# Altium PCB 功耗测试工装.PcbDoc (part 1 of 2)
Units mm, origin at the board's own origin, x right, y up, seen from the top; angles counter-clockwise.
Board outline 154.34 x 149.4 mm, 2 copper layers (Component Side, Bottom Layer), stack 0.325 mm thick; 158 components, 88 nets, 495 pads, 374 vias.
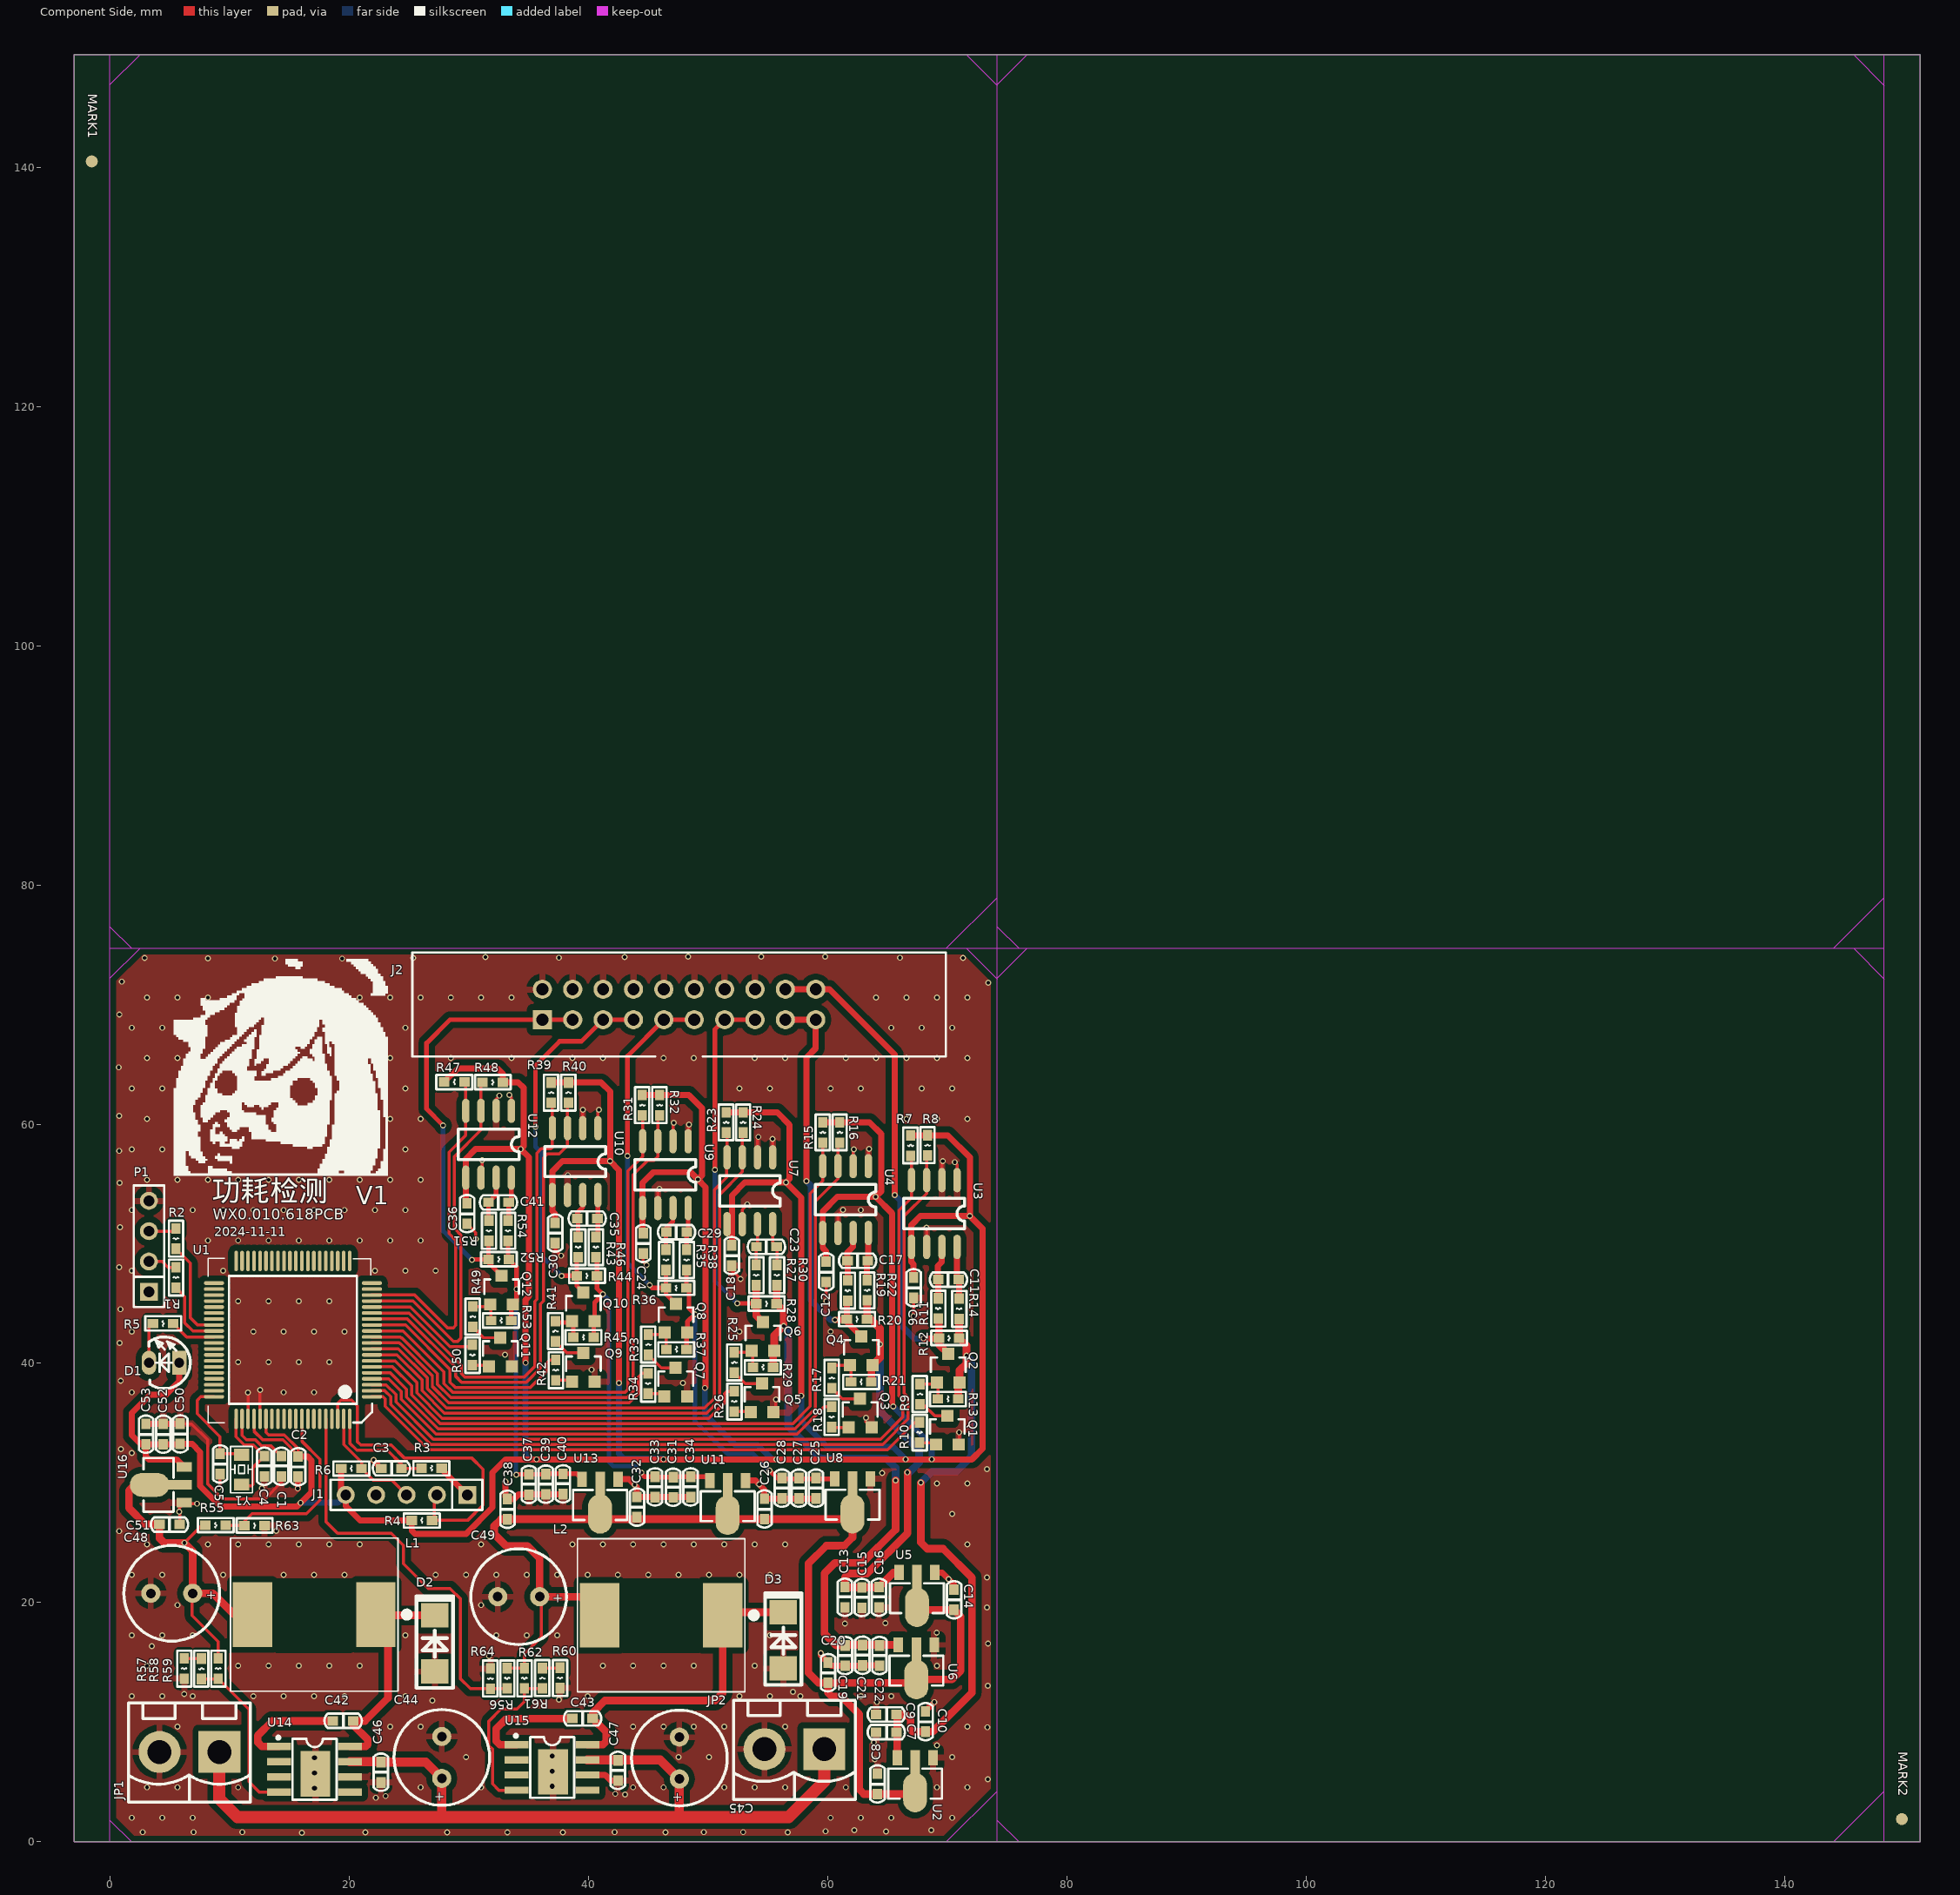
[diagram p0: Component Side view]
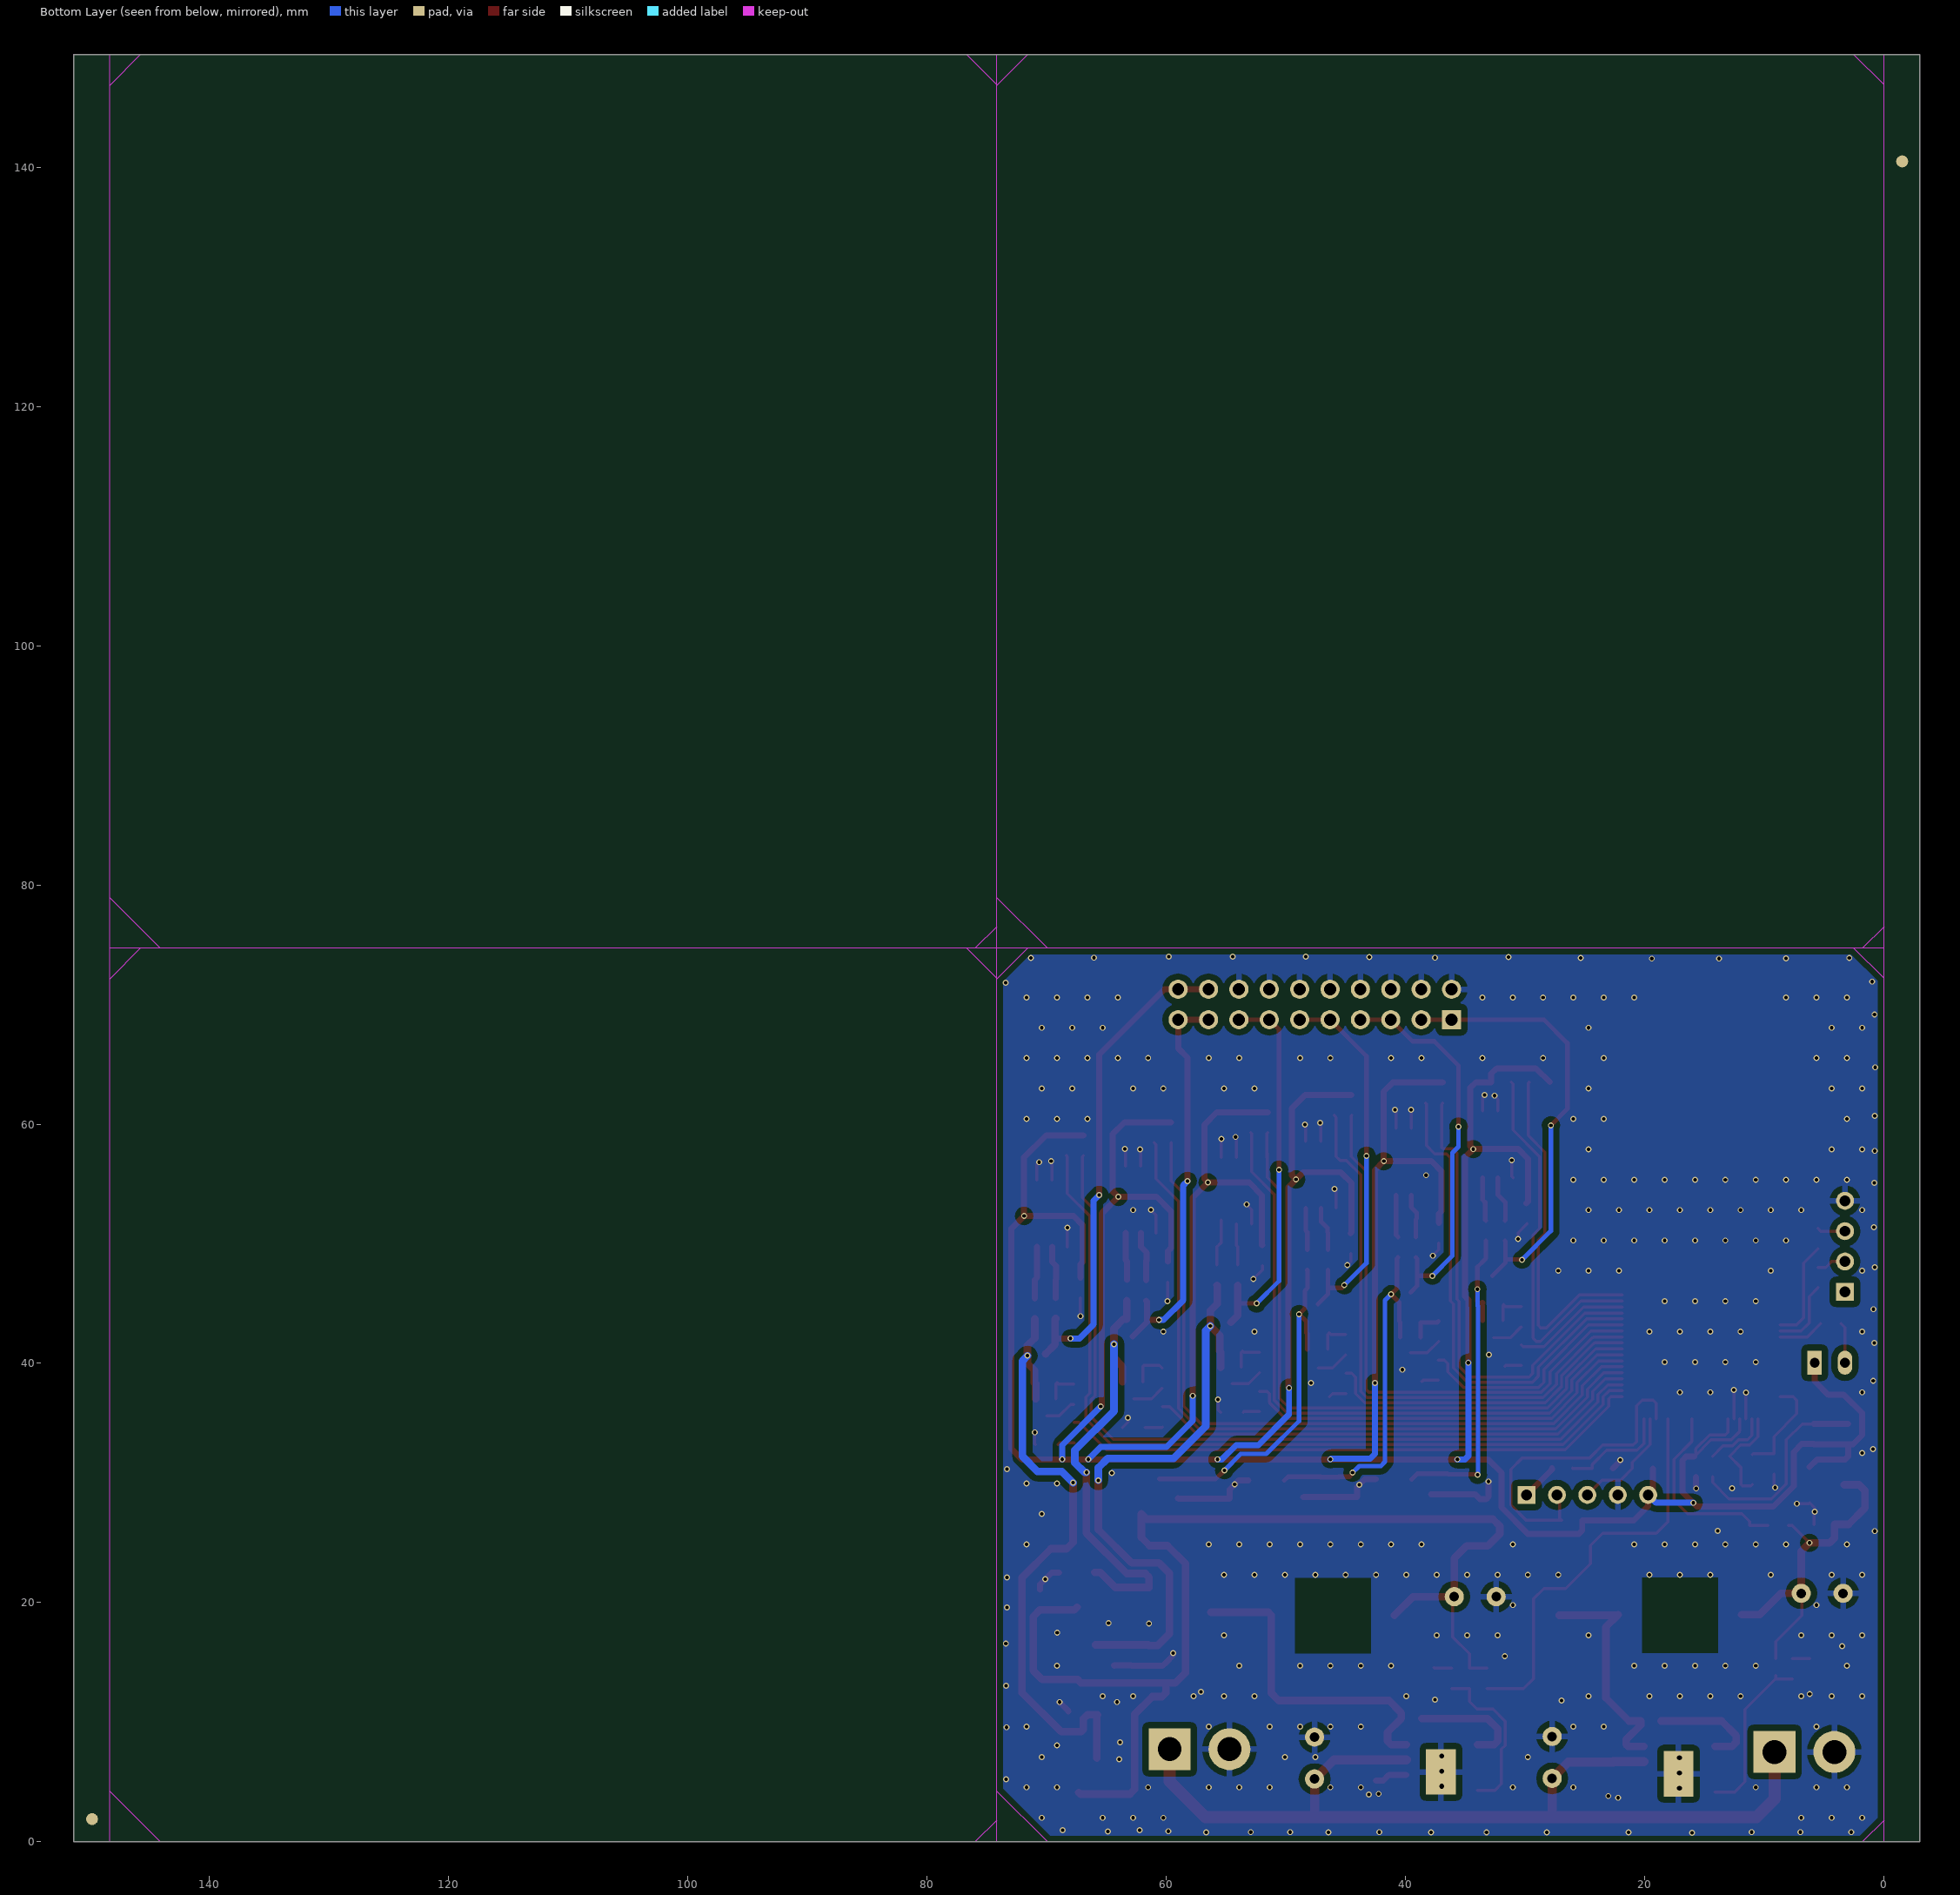
[diagram p1: Bottom Layer view, seen from below]

## Layer stack, top to bottom
Top Solder: solder mask 0.0102, Solder Resist, Dk 3.5
Component Side: signal copper 0.0356
Dielectric 1: core 0.254, FR-4, Dk 4.2
Bottom Layer: signal copper 0.0356
Solder Side: solder mask 0.0102, Solder Resist, Dk 3.5

## Board outline
-3,0 151.336,0 151.336,149.403 -3,149.403

## Design rules (kind name [scope] priority, off if disabled: settings)
Clearance VIA-VIA [ISVIA vs ISVIA] p1: gap=0.508 ignorepadtopadclearanceinfootprint=FALSE except(0: Arc-Hole Track-Hole SMDPad-Hole THPad-Hole Via-Hole Fill-Hole Poly-Hole Region-Hole Text-Hole)
Clearance VIA-PAD [ISVIA vs ISPAD] p2: gap=0.381 ignorepadtopadclearanceinfootprint=FALSE except(0: Arc-Hole Track-Hole SMDPad-Hole THPad-Hole Via-Hole Fill-Hole Poly-Hole Region-Hole Text-Hole)
Clearance VIA-TRACK [ISVIA vs ISTRACK] p3: gap=0.381 ignorepadtopadclearanceinfootprint=FALSE except(0: Arc-Hole Track-Hole SMDPad-Hole THPad-Hole Via-Hole Fill-Hole Poly-Hole Region-Hole Text-Hole)
Clearance Polygon [InPolygon] p4: gap=0.508 ignorepadtopadclearanceinfootprint=FALSE except(0: Arc-Hole Track-Hole SMDPad-Hole THPad-Hole Via-Hole Fill-Hole Poly-Hole Region-Hole Text-Hole; 1.016: Poly-Poly)
Clearance [All] p5: gap=0.178 ignorepadtopadclearanceinfootprint=FALSE except(0: Arc-Hole Track-Hole SMDPad-Hole THPad-Hole Via-Hole Fill-Hole Poly-Hole Region-Hole Text-Hole)
ComponentClearance [All] p1 off: gap=0.254 collisioncheckmode=3 verticalgap=0.254 showdistances=FALSE
FabricationTestPointUsage TestPointUsage [All] p1: valid=0 allowmultiple=FALSE
FabricationTestpoint Testpoint [(IsPad And (OnTopLayer Or OnBottomLayer))] p1: side=3 testpointundercomponent=TRUE minsize=1.016 maxsize=2.54 preferedsize=1.524 minholesize=0 maxholesize=1.016 preferedholesize=0.813 testpointgrid=0.025 allowsidetop=TRUE allowsidebottom=TRUE usegrid=TRUE gridtolerance=0
HoleSize [All] p1 off: absolutevalues=TRUE maxlimit=7.62 minlimit=0 maxpercent=80.000 minpercent=20.000
HoleToHoleClearance [All] p1 off: gap=0.254 allowstackedmicrovias=TRUE
LayerPairs [All] p1 off: enforce=TRUE
MinimumSolderMaskSliver [All] p1 off: minsoldermaskwidth=0.254
NetAntennae [All] p1 off: netantennaetolerance=0
PlaneConnect [All] p1: planeconnectstyle=Relief reliefexpansion=0.508 reliefentries=4 reliefconductorwidth=0.508 reliefairgap=0.254
PolygonConnect [isvia] p1: connectstyle=Direct reliefconductorwidth=0.381 reliefentries=4 polygonreliefangle="90 Angle" airgapwidth=0.254
PolygonConnect PolygonConnect_1 [All] p2: connectstyle=Relief reliefconductorwidth=0.508 reliefentries=4 polygonreliefangle="90 Angle" airgapwidth=0.508
RoutingVias [All] p1: holewidth=0.254 width=0.508 viastyle="Through Hole" minholewidth=0.127 minwidth=0.127 maxholewidth=1.27 maxwidth=2.54
SilkToBoardRegionClearance [All] p1 off:
SilkToSilkClearance [All] p1 off: silktosilkclearance=0.254
SilkToSolderMaskClearance [IsPad] p1 off: minsilkscreentomaskgap=0.254 clearancetoexposedcopper=TRUE
SolderMaskExpansion [All] p1: expansion=0.102
Width [All] p1: maxlimit=7.62 minlimit=0.203 preferedwidth=0.203
18 further rules are at their usual default settings.

## Classes and differential pairs
component class 功耗测试工装2: C1 C2 C3 C4 C5 D1 J1 P1 R1 R2 R3 R4 R5 R6 U1 Y1
component class 功耗测试工装: C6 C7 C8 C9 C10 C11 C12 C13 C14 C15 C16 C17 C18 C19 C20 C21 C22 C23 C24 C25 C26 C27 C28 C29 C30 C31 C32 C33 C34 C35 C36 C37 C38 C39 C40 C41 C42 C43 C44 C45 C46 C47 C48 C49 C50 C51 C52 C53 D2 D3 J2 JP1 JP2 L1 L2 Q1 Q2 Q3 Q4 Q5 Q6 Q7 Q8 Q9 Q10 Q11 Q12 R7 R8 R9 R10 R11 R12 R13 R14 R15 R16 R17 R18 R19 R20 R21 R22 R23 R24 R25 R26 R27 R28 R29 R30 R31 R32 R33 R34 R35 R36 R37 R38 R39 R40 R41 R42 R43 R44 R45 R46 R47 R48 R49 R50 R51 R52 R53 R54 R55 R56 R57 R58 R59 R60 R61 R62 R63 R64 U2 U3 U4 U5 U6 U7 U8 U9 U10 U11 U12 U13 U14 U15 U16

## Components (designator, comment, footprint, x,y, rotation, side; value= is the part's Value field where it differs from the comment)
C1 "100nF/50V" CAP0603 14.326,32.233 r270 top
C2 "100nF/50V" CAP0603 15.723,30.531 r90 top
C3 "33pF/50V" CAP0603 24.359,31.217 r180 top
C4 "12pF/50V" CAP0603 12.903,32.233 r270 top
C5 "12pF/50V" CAP0603 9.195,30.759 r90 top
C6 "100nF/50V" CAP0603 67.183,45.491 r90 top
C7 "10uF/10V" CAP0603 65.735,9.169 r180 top
C8 "100nF/50V" CAP0603 64.16,4.013 r90 top
C9 "100N/50V" CAP0603 65.735,10.643 r180 top
C10 "22pF/50V" CAP0603 68.174,9.22 r90 top
C11 "100nF/50V" CAP0603 69.266,47.015 r0 top
C12 "100nF/50V" CAP0603 59.868,46.812 r90 top
C13 "10uF/10V" CAP0603 61.443,21.285 r270 top
C14 "100nF/50V" CAP0603 70.561,19.406 r90 top
C15 "100N/50V" CAP0603 62.865,21.26 r270 top
C16 "22pF/50V" CAP0603 64.287,21.285 r270 top
C17 "100nF/50V" CAP0603 61.671,48.59 r0 top
C18 "100nF/50V" CAP0603 51.968,48.184 r90 top
C19 "10uF/10V" CAP0603 61.468,16.408 r270 top
C20 "100nF/50V" CAP0603 60.02,13.31 r90 top
C21 "100N/50V" CAP0603 62.916,16.434 r270 top
C22 "22pF/50V" CAP0603 64.338,16.408 r270 top
C23 "100nF/50V" CAP0603 54.051,49.759 r0 top
C24 "100nF/50V" CAP0603 44.577,49.2 r90 top
C25 "10uF/10V" CAP0603 59.03,30.404 r270 top
C26 "100nF/50V" CAP0603 54.712,27 r90 top
C27 "100N/50V" CAP0603 57.607,30.404 r270 top
C28 "22pF/50V" CAP0603 56.185,30.404 r270 top
C29 "100nF/50V" CAP0603 46.533,50.978 r0 top
C30 "100nF/50V" CAP0603 37.211,50.063 r90 top
C31 "10uF/10V" CAP0603 47.092,30.48 r270 top
C32 "100nF/50V" CAP0603 44.044,27.153 r90 top
C33 "100N/50V" CAP0603 45.568,30.505 r270 top
C34 "22pF/50V" CAP0603 48.539,30.505 r270 top
C35 "100nF/50V" CAP0603 39.065,52.121 r0 top
C36 "100nF/50V" CAP0603 29.845,51.689 r90 top
C37 "10uF/10V" CAP0603 35.027,30.709 r270 top
C38 "100nF/50V" CAP0603 33.223,26.975 r90 top
C39 "100N/50V" CAP0603 36.449,30.734 r270 top
C40 "22pF/50V" CAP0603 37.871,30.759 r270 top
C41 "100nF/50V" CAP0603 31.648,53.467 r0 top
C42 "10N/50V" CAP0603 20.32,10.109 r180 top
C43 "10N/50V" CAP0603 40.335,10.312 r180 top
C44 "1000uF/16V" CAPPC_350_800_1600 27.737,5.309 r90 top
C45 "1000uF/16V" CAPPC_350_800_1600 47.6,5.258 r90 top
C46 "100N/50V" CAP0603 22.657,6.655 r270 top
C47 "100N/50V" CAP0603 42.469,6.807 r270 top
C48 "1000uF/16V" CAPPC_350_800_1600 6.909,20.777 r180 top
C49 "1000uF/16V" CAPPC_350_800_1600 35.916,20.498 r180 top
C50 "10uF/10V" CAP0603 5.867,33.274 r90 top
C51 "100nF/50V" CAP0603 4.14,26.543 r0 top
C52 "100N/50V" CAP0603 4.445,33.249 r90 top
C53 "22pF/50V" CAP0603 2.997,33.249 r90 top
D1 "LED_T3R" LED2_300 5.791,40.056 r270 top
D2 "B340A-SMA" DO-214AC 27.153,16.586 r90 top
D3 "B340A-SMA" DO-214AC 56.286,16.84 r90 top
J1 "PIN254_1*5*WXHJ" PIN254_1*5*1100S 29.87,29.007 r180 top
J2 "DC254_2*10" DC254_2*10 47.574,70.002 r90 top
JP1 "KF129_508_2" KF129_508_2 9.144,7.518 r180 top
JP2 "KF129_508_2" KF129_508_2 59.715,7.747 r180 top
L1 "LQS1260M2200_47uH" LQS1212 17.069,18.999 r180 top
L2 "LQS1260M2200_47uH" LQS1212 46.076,18.948 r180 top
MARK1 "MARK" MARK -1.53,140.481 r0 top (schematic designator MARK3)
MARK2 "MARK" MARK 149.809,1.905 r0 top (schematic designator MARK3)
P1 "PIN254_1*4*WXHJ" PIN254_1*4*1100S 3.251,45.974 r90 top
Q1 "NPNS-9013" SOT-23 70.002,34.417 r0 top
Q2 "RZR040P01TL" SOT-23 70.079,39.599 r0 top
Q3 "NPNS-9013" SOT-23 62.713,35.839 r0 top
Q4 "RZR040P01TL" SOT-23 62.814,41.046 r0 top
Q5 "NPNS-9013" SOT-23 54.508,37.109 r0 top
Q6 "RZR040P01TL" SOT-23 54.585,42.24 r0 top
Q7 "NPNS-9013" SOT-23 47.295,38.43 r0 top
Q8 "RZR040P01TL" SOT-23 47.32,43.764 r0 top
Q9 "NPNS-9013" SOT-23 39.573,39.675 r0 top
Q10 "RZR040P01TL" SOT-23 39.573,44.729 r0 top
Q11 "NPNS-9013" SOT-23 32.639,40.945 r0 top
Q12 "RZR040P01TL" SOT-23 32.741,46.126 r0 top
R1 "22R 5%" RES0603 5.512,46.33 r90 top
R2 "22R 5%" RES0603 5.512,49.581 r90 top
R3 "100R 5%" RES0603 26.035,31.242 r0 top
R4 "10K 5%" RES0603 25.222,26.873 r0 top
R5 "1K 5%" RES0603 5.283,43.332 r180 top
R6 "10K 5%" RES0603 19.329,31.217 r0 top
R7 "10K 5%" RES0603 66.929,59.055 r270 top
R8 "10K 5%" RES0603 68.351,59.08 r270 top
R9 "200K 5%" RES0603 67.716,38.278 r270 top
R10 "1K 5%" RES0603 67.691,33.376 r90 top
R11 "10R 5%" RES0603 69.24,43.739 r90 top
R12 "100R 1%" RES0603 70.993,42.113 r180 top
R13 "2M 5%" RES0603 69.215,37.033 r0 top
R14 "10R 5%" RES0603 70.993,43.713 r90 top
R15 "10K 5%" RES0603 59.588,60.147 r270 top
R16 "10K 5%" RES0603 61.011,60.147 r270 top
R17 "200K 5%" RES0603 60.35,39.624 r270 top
R18 "1K 5%" RES0603 60.325,34.671 r90 top
R19 "10R 5%" RES0603 61.671,45.237 r90 top
R20 "100R 1%" RES0603 63.297,43.688 r180 top
R21 "2M 5%" RES0603 61.951,38.456 r0 top
R22 "10R 5%" RES0603 63.297,45.263 r90 top
R23 "10K 5%" RES0603 51.511,60.985 r270 top
R24 "10K 5%" RES0603 52.934,60.985 r270 top
R25 "200K 5%" RES0603 52.197,40.919 r270 top
R26 "1K 5%" RES0603 52.197,35.966 r90 top
R27 "10R 5%" RES0603 54.026,46.533 r90 top
R28 "100R 1%" RES0603 55.728,44.983 r180 top
R29 "2M 5%" RES0603 53.746,39.675 r0 top
R30 "10R 5%" RES0603 55.753,46.533 r90 top
R31 "10K 5%" RES0603 44.501,62.433 r270 top
R32 "10K 5%" RES0603 45.949,62.433 r270 top
R33 "200K 5%" RES0603 45.009,42.418 r270 top
R34 "1K 5%" RES0603 44.983,37.465 r90 top
R35 "10R 5%" RES0603 46.482,47.803 r90 top
R36 "100R 1%" RES0603 48.184,46.304 r180 top
R37 "2M 5%" RES0603 46.507,41.173 r0 top
R38 "10R 5%" RES0603 48.209,47.803 r90 top
R39 "10K 5%" RES0603 36.881,63.475 r270 top
R40 "10K 5%" RES0603 38.329,63.475 r270 top
R41 "200K 5%" RES0603 37.236,43.536 r270 top
R42 "1K 5%" RES0603 37.262,38.583 r90 top
R43 "10R 5%" RES0603 39.141,48.87 r90 top
R44 "100R 1%" RES0603 40.716,47.32 r180 top
R45 "2M 5%" RES0603 38.735,42.189 r0 top
R46 "10R 5%" RES0603 40.615,48.87 r90 top
R47 "10K 5%" RES0603 27.94,63.525 r0 top
R48 "10K 5%" RES0603 32.842,63.5 r180 top
R49 "200K 5%" RES0603 30.328,44.755 r270 top
R50 "1K 5%" RES0603 30.302,39.853 r90 top
R51 "10R 5%" RES0603 31.674,50.241 r90 top
R52 "100R 1%" RES0603 33.35,48.692 r180 top
R53 "2M 5%" RES0603 31.852,43.586 r0 top
R54 "10R 5%" RES0603 33.274,50.241 r90 top
R55 "100K 5%" RES0603 9.677,26.467 r180 top
R56 "100K 5%" RES0603 33.198,12.827 r90 top
R57 "20K 5%" RES0603 6.198,13.64 r90 top
R58 "10K 1%" RES0603 7.645,15.316 r270 top
R59 "100K 1%" RES0603 9.042,13.64 r90 top
R60 "20K 1%" RES0603 37.617,12.852 r90 top
R61 "10K 1%" RES0603 36.144,14.529 r270 top
R62 "100K 1%" RES0603 34.646,12.827 r90 top
R63 "10K 5%" RES0603 12.929,26.441 r180 top
R64 "10K 5%" RES0603 31.801,14.503 r270 top
U1 "FM33LG0x8" LQFP80 15.291,41.961 r180 top
U2 "CE6232A36P" SOT-89 67.31,6.121 r180 top
U3 "INA219" SO-8 70.815,55.321 r270 top
U4 "INA219" SO-8 63.398,56.49 r270 top
U5 "CE6232A36P" SOT-89 67.462,21.615 r180 top
U6 "CE6232A36P" SOT-89 67.412,15.57 r180 top
U7 "INA219" SO-8 55.397,57.226 r270 top
U8 "CE6232A36P" SOT-89 62.078,29.439 r180 top
U9 "INA219" SO-8 48.336,58.572 r270 top
U10 "INA219" SO-8 40.792,59.665 r270 top
U11 "CE6232A36P" SOT-89 51.638,29.312 r180 top
U12 "INA219" SO-8 33.553,61.112 r270 top
U13 "CE6232A36P" SOT-89 40.97,29.413 r180 top
U14 "TPS5430DDA" SOP-8-P 14.122,7.976 r0 top
U15 "TPS5430DDA" SOP-8-P 33.985,8.128 r0 top
U16 "CE6232A33P" SOT-89 5.309,29.845 r90 top
Y1 "32.768kD" SMD-3215_2P 10.998,29.87 r90 top

## Footprints (in the part's own frame and the unit in brackets; to place one, negate y for a bottom-side part, rotate by r counter-clockwise, add the part's x,y. Pads: shape width x height; smd on the part's side, far side on the other; paste and mask are expansions set on the pad)
CAP0603 [mil]
  rect 35x31 smd: 1(-0.49,0) 2(66.51,0)
  silkscreen extent -29,-24 94,23, body extent 1,-15 72,15, height 20
CAPPC_350_800_1600 [mm]
  round 1.6 hole 0.8: 1(0,0) 2(3.5,0)
  silkscreen extent -2.25,-4 5.75,4, body extent -2.26,-4 5.75,4, height 15.11
DC254_2*10 [mm]
  rect 1.6x1.6 hole 1: 1(-1.27,11.43)
  round 1.6 hole 1: 2(1.27,11.43) 3(-1.27,8.89) 4(1.27,8.89) 5(-1.27,6.35) 6(1.27,6.35) 7(-1.27,3.81) 8(1.27,3.81) 9(-1.27,1.27) 10(1.27,1.27) 11(-1.27,-1.27) 12(1.27,-1.27) 13(-1.27,-3.81) 14(1.27,-3.81) 15(-1.27,-6.35) 16(1.27,-6.35) 17(-1.27,-8.89) 18(1.27,-8.89) 19(-1.27,-11.43) 20(1.27,-11.43)
  silkscreen extent -4.35,-22.3 4.35,22.3
DO-214AC [mil]
  rect 80x90.55 smd: 1(-92.5,0) 2(92.5,0)
  silkscreen extent -146,-60 156,60, body extent -91,-53 90,53, height 94
KF129_508_2 [mm]
  rect 3.5x3.5 hole 2: 1(0,0)
  round 3.5 hole 2: 2(5,0)
  silkscreen extent -2.6,-4.1 7.6,4.2
LED2_300 [mm]
  rect 2x1.2 hole 0.813: 1(0,0)
  oval 2x1.2 hole 0.813: 2(0,-2.54)
  silkscreen extent -2.16,-2.53 2.16,0.91, body extent -1.65,-2.91 1.64,0.39, height 5.51
LQFP80 [mm]
  oval 1.7x0.3 smd: 1(-6.6,4.75) 2(-6.6,4.25) 3(-6.6,3.75) 4(-6.6,3.25) 5(-6.6,2.75) 6(-6.6,2.25) 7(-6.6,1.75) 8(-6.6,1.25) 9(-6.6,0.75) 10(-6.6,0.25) 11(-6.6,-0.25) 12(-6.6,-0.75) 13(-6.6,-1.25) 14(-6.6,-1.75) 15(-6.6,-2.25) 16(-6.6,-2.75) 17(-6.6,-3.25) 18(-6.6,-3.75) 19(-6.6,-4.25) 20(-6.6,-4.75) 41(6.6,-4.75) 42(6.6,-4.25) 43(6.6,-3.75) 44(6.6,-3.25) 45(6.6,-2.75) 46(6.6,-2.25) 47(6.6,-1.75) 48(6.6,-1.25) 49(6.6,-0.75) 50(6.6,-0.25) 51(6.6,0.25) 52(6.6,0.75) 53(6.6,1.25) 54(6.6,1.75) 55(6.6,2.25) 56(6.6,2.75) 57(6.6,3.25) 58(6.6,3.75) 59(6.6,4.25) 60(6.6,4.75)
  oval 0.3x1.7 smd: 21(-4.75,-6.6) 22(-4.25,-6.6) 23(-3.75,-6.6) 24(-3.25,-6.6) 25(-2.75,-6.6) 26(-2.25,-6.6) 27(-1.75,-6.6) 28(-1.25,-6.6) 29(-0.75,-6.6) 30(-0.25,-6.6) 31(0.25,-6.6) 32(0.75,-6.6) 33(1.25,-6.6) 34(1.75,-6.6) 35(2.25,-6.6) 36(2.75,-6.6) 37(3.25,-6.6) 38(3.75,-6.6) 39(4.25,-6.6) 40(4.75,-6.6) 61(4.75,6.6) 62(4.25,6.6) 63(3.75,6.6) 64(3.25,6.6) 65(2.75,6.6) 66(2.25,6.6) 67(1.75,6.6) 68(1.25,6.6) 69(0.75,6.6) 70(0.25,6.6) 71(-0.25,6.6) 72(-0.75,6.6) 73(-1.25,6.6) 74(-1.75,6.6) 75(-2.25,6.6) 76(-2.75,6.6) 77(-3.25,6.6) 78(-3.75,6.6) 79(-4.25,6.6) 80(-4.75,6.6)
  silkscreen extent -6.62,-6.81 7.1,6.91, body extent -5.33,-5.33 5.36,5.33, height 2
LQS1212 [mm]
  rect 3.3x5.4 smd: 1(-5.15,0) 2(5.15,0)
  silkscreen extent -8,-6.4 7,6.4, body extent -6.35,-6.1 6.35,6.1, height 6
MARK [mm]
  round 1 smd: 0(0,0)
  round 1 smd far side: 1(0,0)
  Component Side pour cut-out: -1.5,0 -1.386,-0.574 -1.061,-1.061 -0.574,-1.386 0,-1.5 0,-1.5 0.574,-1.386 1.061,-1.061 1.386,-0.574 1.5,0 1.5,0 1.386,0.574 1.061,1.061 0.574,1.386 0,1.5 0,1.5 -0.574,1.386 -1.061,1.061 -1.386,0.574 -1.5,0
  Bottom Layer pour cut-out: -1.5,0 -1.386,-0.574 -1.061,-1.061 -0.574,-1.386 0,-1.5 0,-1.5 0.574,-1.386 1.061,-1.061 1.386,-0.574 1.5,0 1.5,0 1.386,0.574 1.061,1.061 0.574,1.386 0,1.5 0,1.5 -0.574,1.386 -1.061,1.061 -1.386,0.574 -1.5,0
PIN254_1*4*1100S [mm] "Connector; Header; 4 Position"
  rect 1.5x1.5 hole 0.9: 1(0,0)
  round 1.5 hole 0.9: 2(2.54,0) 3(5.08,0) 4(7.62,0)
  silkscreen extent -1.27,-1.27 8.89,1.27, body extent -1.3,-1.3 8.86,1.24, height 8.54
PIN254_1*5*1100S [mm]
  rect 1.5x1.5 hole 0.9: 1(0,0)
  round 1.5 hole 0.9: 2(2.54,0) 3(5.08,0) 4(7.62,0) 5(10.16,0)
  silkscreen extent -1.27,-1.27 11.43,1.27
RES0603 [mil]
  rect 35x31 smd: 1(0,0) 2(67,0)
  silkscreen extent -26,-24 92,23, body extent 0,-15 71,15, height 12
SMD-3215_2P [mm]
  rect 1x1.3 smd: 1(0,0) 2(2.5,0)
  silkscreen extent -0.69,-0.91 3.19,0.91, body extent -0.3,-0.99 2.9,0.99, height 0.7
SO-8 [mil]
  oval 80x24 smd: 1(0,0) 2(0,-50) 3(0,-100) 4(0,-150) 5(220,-150) 6(220,-100) 7(220,-50) 8(220,0)
  silkscreen extent 60,-175 160,25, body extent -7,-171 229,21, height 67
SOP-8-P [mm]
  rect 2x0.6 smd: 1(0,0) 2(0,-1.27) 3(0,-2.54) 4(0,-3.81) 5(5.94,-3.81) 6(5.94,-2.54) 7(5.94,-1.27) 8(5.94,0)
  rect 2.5x3.8 smd: 9(3.048,-2.286)
  rect 2.5x3.8 smd far side: 9(3.048,-2.286)
  silkscreen extent -0.18,-4.44 4.83,0.86, body extent 0.38,-4.57 5.71,0.76, height 1.8
SOT-23 [mil]
  rect 40x40 smd: 1(-37.4,-47.24) 2(37.4,-47.24) 3(0,47.24)
  silkscreen extent -57,-12 57,35, body extent -57,-55 57,55, height 47
SOT-89 [mm]
  rect 0.8x1.27 smd: 1(-1.5,-0.9) 3(1.5,-0.9)
  oval 2x3.3 smd: 2(0,2)
  rect 0.8x2.54 smd: 2(0,-0.265)
  silkscreen extent -2.25,0 2.25,2.5, body extent -2.25,-1.02 2.25,2.92, height 1.4

## Part data
C1 C2 C6 C8 C11 C12 C14 C17 C18 C20 C23 C24 C26 C29 C30 C32 C35 C36 C38 C41 C51: library part 101020103-0021, "104pF,50 V,±10%,0603,国巨,CC0603KRX7R9BB104", Part Name=0603贴片电容, ID=3, Part Number=101020103-0021, SMD/DIP=SMD
C3: library part 101020103-0027, "33pF,50 V,±10%,0603,国巨,CC0603KRNPO9BN33", Part Name=0603贴片电容, ID=17, Part Number=101020103-0027, SMD/DIP=SMD
C4 C5: library part 101020103-0005, "12P,50 V,±5%,0603,国巨,CC0603JRNPO9BN12", Part Name=0603贴片电容, ID=11, Part Number=101020103-0005, SMD/DIP=SMD
C7 C13 C19 C25 C31 C37 C50: library part 101020103-0026, "106pF,10 V,±10%,0603,村田,GRM188R61A106KE47D", Part Name=0603贴片电容, ID=8, Part Number=101020103-0026, SMD/DIP=SMD
C9 C15 C21 C27 C33 C39 C46 C47 C52: library part 101020103-0021, "100N/50V，±10%，0603", Part Name=0603贴片电容, ID=34, Part Number=101020103-0021
C10 C16 C22 C28 C34 C40 C53: library part 101020103-0009, "22pF,50 V,±5%,0603,国巨,CC0603JRNPO9BN22", Part Name=0603贴片电容, ID=16, Part Number=101020103-0009, SMD/DIP=SMD
C42 C43: library part 101020103-0007, "10N/50V，±10%，0603", Part Name=0603贴片电容, ID=35, Part Number=101020103-0007
C44 C45 C48 C49: library part 1010203-0029, "1000uF,16 V,±20%,8*20mm,Rubycon,16ZLH1000M", Part Name=电解电容, ID=2, Part Number=1010203-0029, SMD/DIP=DIP
D1: library part 101040102-0001, "圆形插件,3mm 圆形,插件,红光,湖北匡通电子有限公司,3BB4HC", Part Name=发光二极管, ID=6, Part Number=101040102-0001, SMD/DIP=DIP
D2 D3: library part 101040101-0014, Part Name=贴片肖特基, ID=24, Part Number=101040101-0014
J1: library part AD_WXHJ_PinHeader_02, "1*5 ，Φ1.0 ，2.54mm，直脚,无需焊接器件", Part Name=排针, ID=17, Part Number=AD_WXHJ_PinHeader_02, SMD/DIP=DIP
J2: library part 1010902-0139, "DC2 2.54mm 2x10pin,2.54mm间距，2x10pin，32×8.55×27.5mm,母头,双排,双排牛角座", Part Name=DC牛角座, ID=4, Part Number=1010902-0139, SMD/DIP=DIP
JP1 JP2: library part 1010904-0015, "KF129-2P,螺丝紧固,2,ABS,松涛", Part Name=接线端子, ID=7, Part Number=1010904-0015, SMD/DIP=DIP
L1 L2: library part 1010302-0007, "47uH/2.2A,±20%，0.072Ω，L1200X1200X600", Part Name=贴片电感, ID=3, Part Number=1010302-0007
MARK1 MARK2: library part AD_WXHJ_MARK_01, "MARK点", ID=8, Part Name=MARK点, Part Number=AD_WXHJ_MARK_01, SMD/DIP=SMD
P1: library part AD_WXHJ_PinHeader_01, "1*4 ，Φ1.0 ，2.54mm，直脚,无需焊接器件", Part Name=排针, ID=16, Part Number=AD_WXHJ_PinHeader_01, SMD/DIP=DIP
Q1 Q3 Q5 Q7 Q9 Q11: library part 101040201-0002, "9013,NPN,SOT-23,长电,S9013", Part Name=贴片三极管, ID=15, Part Number=101040201-0002, SMD/DIP=SMD
Q2 Q4 Q6 Q8 Q10 Q12: library part 101040201-0010, "RZR040P01TL；1.5v导通,P-MOS,SOT-23,罗姆,RZR040P01TL", Part Name=PMOS管, ID=18, Part Number=101040201-0010, SMD/DIP=SMD
R1 R2: library part 101010103-0009, "国巨,±5%,0603,,155 ℃,-55 ℃,RC0603JR-0722RL,无铅,200 ppm/℃,1/10W,,22欧", Part Name=0603贴片电阻, ID=18, Part Number=101010103-0009, SMD/DIP=SMD
R3: library part 101010103-0022, "100R,±5%,1/10W,0603,国巨,RC0603JR-07100RL", Part Name=0603贴片电阻, ID=5, Part Number=101010103-0022, SMD/DIP=SMD
R4 R6 R7 R8 R15 R16 R23 R24 R31 R32 R39 R40 R47 R48: library part 101010103-0003, "国巨,±5%,0603,,155 ℃,-55 ℃,RC0603JR-0710KL,无铅,200 ppm/℃,1/10W,,10K", Part Name=0603贴片电阻, ID=7, Part Number=101010103-0003, SMD/DIP=SMD
R5 R10 R18 R26 R34 R42 R50: library part 101010103-0008, "1K,±5%,1/10W,0603,国巨,RC0603JR-071KL", Part Name=0603贴片电阻, Part Number=101010103-0008, SMD/DIP=SMD
  R5: ID=9
  R10 R18 R26 R34 R42 R50: ID=10
R9 R17 R25 R33 R41 R49: library part 101010103-0034, "200K,±5%,1/10W,0603,国巨,RC0603JR-07200KL", Part Name=0603贴片电阻, ID=13, Part Number=101010103-0034, SMD/DIP=SMD
R11 R14 R19 R22 R27 R30 R35 R38 R43 R46 R51 R54: library part 101010103-0017, "10R,±5%,1/10W,0603,国巨,RC0603JR-0710RL", Part Name=0603贴片电阻, ID=8, Part Number=101010103-0017, SMD/DIP=SMD
R12 R20 R28 R36 R44 R52: library part 101010103-0041, "100Ω,±1%,1/10W,0603,国巨股份有限公司,RC0603FR-07100RL", Part Name=0603贴片电阻, ID=4, Part Number=101010103-0041, SMD/DIP=SMD
R13 R21 R29 R37 R45 R53: library part 101010103-0025, "国巨,±5%,0603,,155 ℃,-55 ℃,RC0603JR-072ML,含铅,100 ppm/℃,1/10W,,2M", Part Name=0603贴片电阻, ID=20, Part Number=101010103-0025, SMD/DIP=SMD
R55 R56 R63 R64: library part 101010103-0005, "100K±5%,1/10W,0603", Part Name=0603贴片电阻, ID=30, Part Number=101010103-0005
R57: library part 101010103-0004, "国巨,±5%,0603,,155 ℃,-55 ℃,RC0603JR-0720KL,无铅,200 ppm/℃,1/10W,,20K", Part Name=0603贴片电阻, ID=15, Part Number=101010103-0004, SMD/DIP=SMD
R58 R61: library part 101010103-0053, "8.2k±1%,1/10W,0603", Part Name=0603贴片电阻, ID=142, Part Number=101010103-0053
R59 R62: library part 101010103-0048, "20K±1%,1/10W,0603", Part Name=0603贴片电阻, ID=139, Part Number=101010103-0048
R60: library part 101010103-0048, "20K,±1%,1/10W,0603,国巨,RC0603FR-0720KL", Part Name=0603贴片电阻, ID=14, Part Number=101010103-0048, SMD/DIP=SMD
U2 U5 U6 U8 U11 U13: library part 1010503-0031, "CE6232A36P,CE6232A36P,SOT89-3,8 V,1.8 V,0.11 V,3.6 V,600mA,0.8 uA,南京芯力微电子有限公司", Part Name=贴片稳压器, ID=30, Part Number=1010503-0031, SMD/DIP=SMD
U3 U4 U7 U9 U10 U12: library part Component_2
U14 U15: library part 101050101-0053, "TPS5430DDA,SOP8,TI,TPS5430DDA", Part Name=电源芯片, ID=9, Part Number=101050101-0053, SMD/DIP=SMD
U16: library part 1010503-0029, "CE6232-3.3,CE6232-3.3,SOT89-3,8V,1.8V,0.11V,3.3V,300mA,0.8uA,南京芯力微电子有限公司", Part Name=线性稳压芯片, ID=5, Part Number=1010503-0029, SMD/DIP=SMD
Y1: library part 1010601-0009, Part Name=贴片晶振, Part Number=1010601-0020, ID=20, SMD/DIP=SMD

## Via types
v1: diameter 0.5, hole 0.3, Component Side to Bottom Layer, tented both sides, 368 vias
v2: diameter 0.813, hole 0.406, Component Side to Bottom Layer, 6 vias

## Nets (pads, with @x,y where several pads share a name; then routed paths per layer and width w, separated by ;. In a path a pad name is that pad's centre, name@x,y a point inside that pad or via, vN(x,y) a via of type N, cw(c..) or ccw(c..) an arc to the next point about the centre after c; other vN are vias at no path point)
3.3V: C2.2 C6.2 C12.2 C18.2 C24.2 C30.2 C36.2 C50.1 C52.1 C53.1 D1.1 J1.5 R4.1 R6.1 R7.1 R8.1 R15.1 R16.1 R23.1 R24.1 R31.1 R32.1 R39.1 R40.1 R47.1 R48.1 U1.64 U1.66 U3.5 U4.5 U7.5 U9.5 U10.5 U12.5 U16.3 | length 395.3
  Component Side w0.254: U1.64@12.041,35.361 12.041,34.329 12.765,33.604 14.453,33.604 C2.2@15.85,32.207 ; U1.66@13.041,35.361 13.041,34.229 13.259,34.011 14.58,34.011 15.723,32.868 C2.2@15.723,32.22
  Component Side w0.508: D1.1@5.791,40.056 5.791,38.506 4.648,37.363 3.353,37.363 1.829,35.839 1.829,33.985 2.578,33.236 C53.1@2.997,33.236 ; U16.3@6.209,31.345 5.575,31.979 3.251,31.979 2.997,32.233 C53.1@2.997,33.236 ; C2.2@15.85,32.207 16.535,32.207 16.84,31.902 16.84,29.235 15.646,28.042 9.246,28.042 7.544,29.743 7.544,32.588 6.87,33.262 C50.1@5.867,33.262 5.842,33.236 C52.1@4.445,33.236 C53.1@2.997,33.236 ; R6.1@19.329,31.217 19.329,29.388 J1.5@19.71,29.007 19.71,28.067 20.904,26.873 R4.1@25.222,26.873 25.222,26.035 25.502,25.756 29.769,25.756 31.979,27.965 31.979,30.861 33.096,31.979 v1(35.662,31.979) v1(46.279,31.979) v1(55.702,31.979) v1(66.523,31.979) v1(68.707,31.979) 72.06,31.979 72.949,32.868 72.949,51.257 v1(71.882,52.324) ; R47.1@27.94,63.525 29.083,64.668 32.385,64.668 32.842,64.211 R48.1@32.842,63.5 34.112,63.5 34.569,63.043 34.569,58.141 v1(34.341,57.912) ; C36.2@29.896,53.378 29.743,53.531 U12.5@29.743,55.524 29.743,57.099 30.556,57.912 v1(34.341,57.912) ; v1(34.747,40.056) 34.747,45.314 35.027,45.593 35.027,57.226 v1(34.341,57.912) ; R39.1@36.881,63.475 R40.1@38.329,63.475 41.072,63.475 41.808,62.738 v1(41.808,56.896) ; C30.2@37.211,51.753 37.211,52.502 36.982,52.73 U10.5@36.982,54.077 36.982,56.058 37.821,56.896 v1(41.808,56.896) ; v1(42.545,38.354) 42.545,56.159 v1(41.808,56.896) ; R31.1@44.501,62.433 R32.1@45.949,62.433 48.387,62.433 49.479,61.341 49.479,55.702 v1(49.149,55.372) ; C24.2@44.577,50.889 44.526,50.94 U9.5@44.526,52.984 44.526,55.093 45.415,55.982 48.539,55.982 v1(49.149,55.372) ; v1(49.733,37.948) 49.78,37.994 49.78,54.741 v1(49.149,55.372) ; R23.1@51.511,60.985 R24.1@52.934,60.985 55.778,60.985 56.82,59.944 56.82,55.423 v1(56.515,55.118) ; C18.2@51.968,49.873 51.994,49.899 51.994,54.051 53.061,55.118 v1(56.515,55.118) ; v1(57.785,37.287) 57.785,53.848 v1(56.515,55.118) ; R15.1@59.588,60.147 R16.1@61.011,60.147 63.5,60.147 64.465,59.182 64.465,54.381 v1(64.008,53.924) ; C12.2@59.868,48.502 59.868,49.378 59.588,49.657 U4.5@59.588,50.902 59.588,52.705 60.808,53.924 v1(64.008,53.924) ; v1(65.481,36.398) 65.405,36.474 65.405,52.527 v1(64.008,53.924) ; R7.1@66.929,59.055 70.053,59.055 71.882,57.226 v1(71.882,52.324) ; C6.2@67.183,47.181 67.183,48.285 67.005,48.463 U3.5@67.005,49.733 67.005,51.562 67.767,52.324 v1(71.882,52.324)
  Bottom Layer w0.508: v1(15.926,28.346) 19.05,28.346 J1.5@19.71,29.007 ; v1(34.747,40.056) 34.747,32.258 35.027,31.979 v1(35.662,31.979) ; v1(42.545,38.354) 42.545,32.436 42.939,32.042 46.215,32.042 v1(46.279,31.979) ; v1(49.733,37.948) 49.733,35.738 52.299,33.172 54.153,33.172 55.347,31.979 v1(55.702,31.979) ; v1(57.785,37.287) 57.785,35.204 59.969,33.02 65.481,33.02 v1(66.523,31.979) ; v1(65.481,36.398) 68.707,33.172 v1(68.707,31.979)
3_6V_1: C7.1 C9.1 C10.1 Q2.2 R12.1 R13.2 R14.1 U2.3 | length 53.5
  Component Side w0.635: U2.3@65.81,7.021 65.81,10.58 C9.1@65.748,10.643 66.573,10.643 66.929,10.287 66.929,9.373 67.094,9.208 C10.1@68.174,9.208 68.796,9.208 72.06,12.471 72.06,22.098 69.647,24.511 68.326,24.511 67.793,25.044 v1(67.793,30.023) ; R13.2@70.917,37.033 70.917,38.287 Q2.2@71.029,38.399 71.029,39.431 71.603,40.005 v1(71.603,40.64) 71.603,41.504 R12.1@70.993,42.113 R14.1@70.993,43.713
  Bottom Layer w0.635: v1(67.793,30.023) 68.732,30.963 70.764,30.963 72.034,32.233 72.034,40.208 v1(71.603,40.64)
3_6V_1_OUT: J2.18 J2.20 Q2.3 R11.1 R12.2 | length 41.2
  Component Side w0.508: J2.18@56.464,71.272 J2.20@59.004,71.272 60.147,71.272 65.596,65.824 v1(65.596,54.064) ; v1(67.996,42.088) 69.266,42.088 R12.2@69.291,42.113
  Component Side w0.635: R11.1@69.24,43.739 69.291,43.688 R12.2@69.291,42.113 69.291,41.586 Q2.3@70.079,40.799
  Bottom Layer w0.508: v1(65.596,54.064) 66.065,53.594 66.065,43.256 67.234,42.088 v1(67.996,42.088)
3_6V_2: C13.1 C15.1 C16.1 Q4.2 R20.1 R21.2 R22.1 U5.3 | length 38
  Component Side w0.635: R22.1@63.297,45.263 R20.1@63.297,43.688 63.602,43.688 64.364,42.926 v1(64.364,41.605) 64.364,40.446 Q4.2@63.764,39.846 63.652,39.735 R21.2@63.652,38.456 ; U5.3@65.962,22.515 65.505,22.515 C16.1@64.287,21.298 64.262,21.272 C15.1@62.865,21.272 61.468,21.272 C13.1@61.443,21.298 61.443,22.123 61.747,22.428 63.297,22.428 66.675,25.806 v1(66.675,30.886)
  Bottom Layer w0.635: v1(64.364,41.605) 64.364,36.017 67.64,32.741 67.64,31.699 66.827,30.886 v1(66.675,30.886)
3_6V_2_OUT: J2.17 J2.19 Q4.3 R19.1 R20.2 | length 33.8
  Component Side w0.508: J2.17@56.464,68.732 J2.19@59.004,68.732 59.004,66.345 58.217,65.557 v1(58.217,55.245) ; v1(60.604,43.637) 61.423,43.637 R20.2@61.595,43.466 ; R19.1@61.671,45.237 61.595,45.161 R20.2@61.595,43.688 R20.2@61.595,43.466 ; Q4.3@62.814,42.246 R20.2@61.595,43.466
  Bottom Layer w0.508: v1(58.217,55.245) 58.572,54.889 58.572,45.281 60.216,43.637 v1(60.604,43.637)
3_6V_3: C19.1 C21.1 C22.1 Q6.2 R28.1 R29.2 R30.1 U6.3 | length 50.7
  Component Side w0.635: R29.2@55.448,39.675 55.448,40.954 Q6.2@55.535,41.04 55.535,42.352 v1(56.312,43.129) 56.312,44.399 R28.1@55.728,44.983 55.728,46.507 R30.1@55.753,46.533 ; v1(65.684,30.226) 65.684,26.111 62.89,23.317 60.604,23.317 59.741,22.454 59.741,17.399 60.719,16.421 C19.1@61.468,16.421 61.517,16.47 U6.3@65.912,16.47
  Bottom Layer w0.635: v1(56.312,43.129) 56.693,42.748 56.693,34.747 59.385,32.055 64.897,32.055 65.684,31.267 v1(65.684,30.226)
3_6V_3_OUT: J2.13 J2.15 Q6.3 R27.1 R28.2 | length 32.3
  Component Side w0.381: v1(50.571,56.185) 50.571,67.92 J2.13@51.384,68.732 J2.15@53.924,68.732 ; v1(52.451,45.009) 54,45.009 R28.2@54.026,44.983
  Component Side w0.635: R27.1@54.026,46.533 R28.2@54.026,44.983 54.026,43.999 Q6.3@54.585,43.44
  Bottom Layer w0.381: v1(50.571,56.185) 50.571,46.888 v1(52.451,45.009)
3_6V_4: C25.1 C27.1 C28.1 Q8.2 R36.1 R37.2 R38.1 U8.3 | length 29.8
  Component Side w0.381: R37.2@48.209,41.173 48.209,42.503 Q8.2@48.27,42.564 48.27,43.495 v1(48.895,44.12) 48.412,44.602 48.412,46.076 R36.1@48.184,46.304 48.184,47.777 R38.1@48.209,47.803 ; v1(55.143,31.064) 55.869,30.339 U8.3@60.578,30.339
  Bottom Layer w0.381: v1(48.895,44.12) 48.895,35.179 51.638,32.436 53.772,32.436 v1(55.143,31.064)
3_6V_4_OUT: J2.9 J2.11 Q8.3 R35.1 R36.2 | length 31.4
  Component Side w0.381: v1(43.256,57.353) 43.256,65.684 J2.9@46.304,68.732 J2.11@48.844,68.732 ; v1(45.11,46.533) 45.339,46.304 R36.2@46.482,46.304 ; R35.1@46.482,47.803 R36.2@46.482,46.304 ; Q8.3@47.32,44.964 46.482,45.802 R36.2@46.482,46.304
  Bottom Layer w0.381: v1(43.256,57.353) 43.256,48.387 v1(45.11,46.533)
3_6V_5: C31.1 C33.1 C34.1 Q10.2 R44.1 R45.2 R46.1 U11.3 | length 30.6
  Component Side w0.381: R45.2@40.437,42.189 40.437,43.443 Q10.2@40.523,43.529 40.523,45.095 v1(41.199,45.771) 40.716,46.253 R44.1@40.716,47.32 40.716,48.768 R46.1@40.615,48.87 ; v1(44.425,30.861) 44.425,30.785 44.692,30.518 C33.1@45.568,30.518 45.593,30.492 C31.1@47.092,30.492 47.117,30.518 C34.1@48.539,30.518 49.832,30.518 U11.3@50.138,30.212
  Bottom Layer w0.381: v1(41.199,45.771) 41.707,45.263 41.707,31.775 42.062,31.42 43.866,31.42 v1(44.425,30.861)
3_6V_5_OUT: J2.5 J2.7 Q10.3 R43.1 R44.2 | length 32.8
  Component Side w0.381: v1(35.56,59.792) 35.56,64.897 37.592,66.929 39.421,66.929 J2.5@41.224,68.732 J2.7@43.764,68.732 ; v1(37.744,47.32) R44.2@39.014,47.32 ; R43.1@39.141,48.87 39.014,48.743 R44.2@39.014,47.32 ; Q10.3@39.573,45.929 39.014,46.488 R44.2@39.014,47.32
  Bottom Layer w0.381: v1(35.56,59.792) 35.56,58.115 36.068,57.607 36.068,48.997 v1(37.744,47.32)
3_6V_6: C37.1 C39.1 C40.1 Q12.2 R52.1 R53.2 R54.1 U13.3 | length 28.6
  Component Side w0.381: R54.1@33.274,50.241 33.274,48.768 R52.1@33.35,48.692 33.985,48.057 v1(33.985,46.203) 33.985,45.221 Q12.2@33.691,44.926 33.553,44.789 R53.2@33.553,43.586 ; v1(33.96,30.683) 33.998,30.721 C37.1@35.027,30.721 36.424,30.721 C39.1@36.449,30.746 36.474,30.772 C40.1@37.871,30.772 39.012,30.772 U13.3@39.47,30.313
  Component Side w0.508: Q12.2@33.553,45.064 Q12.2@33.691,44.926
  Bottom Layer w0.381: v1(33.96,30.683) 33.926,30.717 33.926,44.788 33.96,44.822 33.96,46.203 v1(33.985,46.203)